# Altium PCB cs301_Team01_Artwork.PcbDoc (part 1 of 2)
Units mm, origin at the board's own origin, x right, y up, seen from the top; angles counter-clockwise.
Board outline 87.88 x 127 mm, 2 copper layers (Top Layer, Bottom Layer); 173 components, 113 nets, 459 pads, 113 vias.
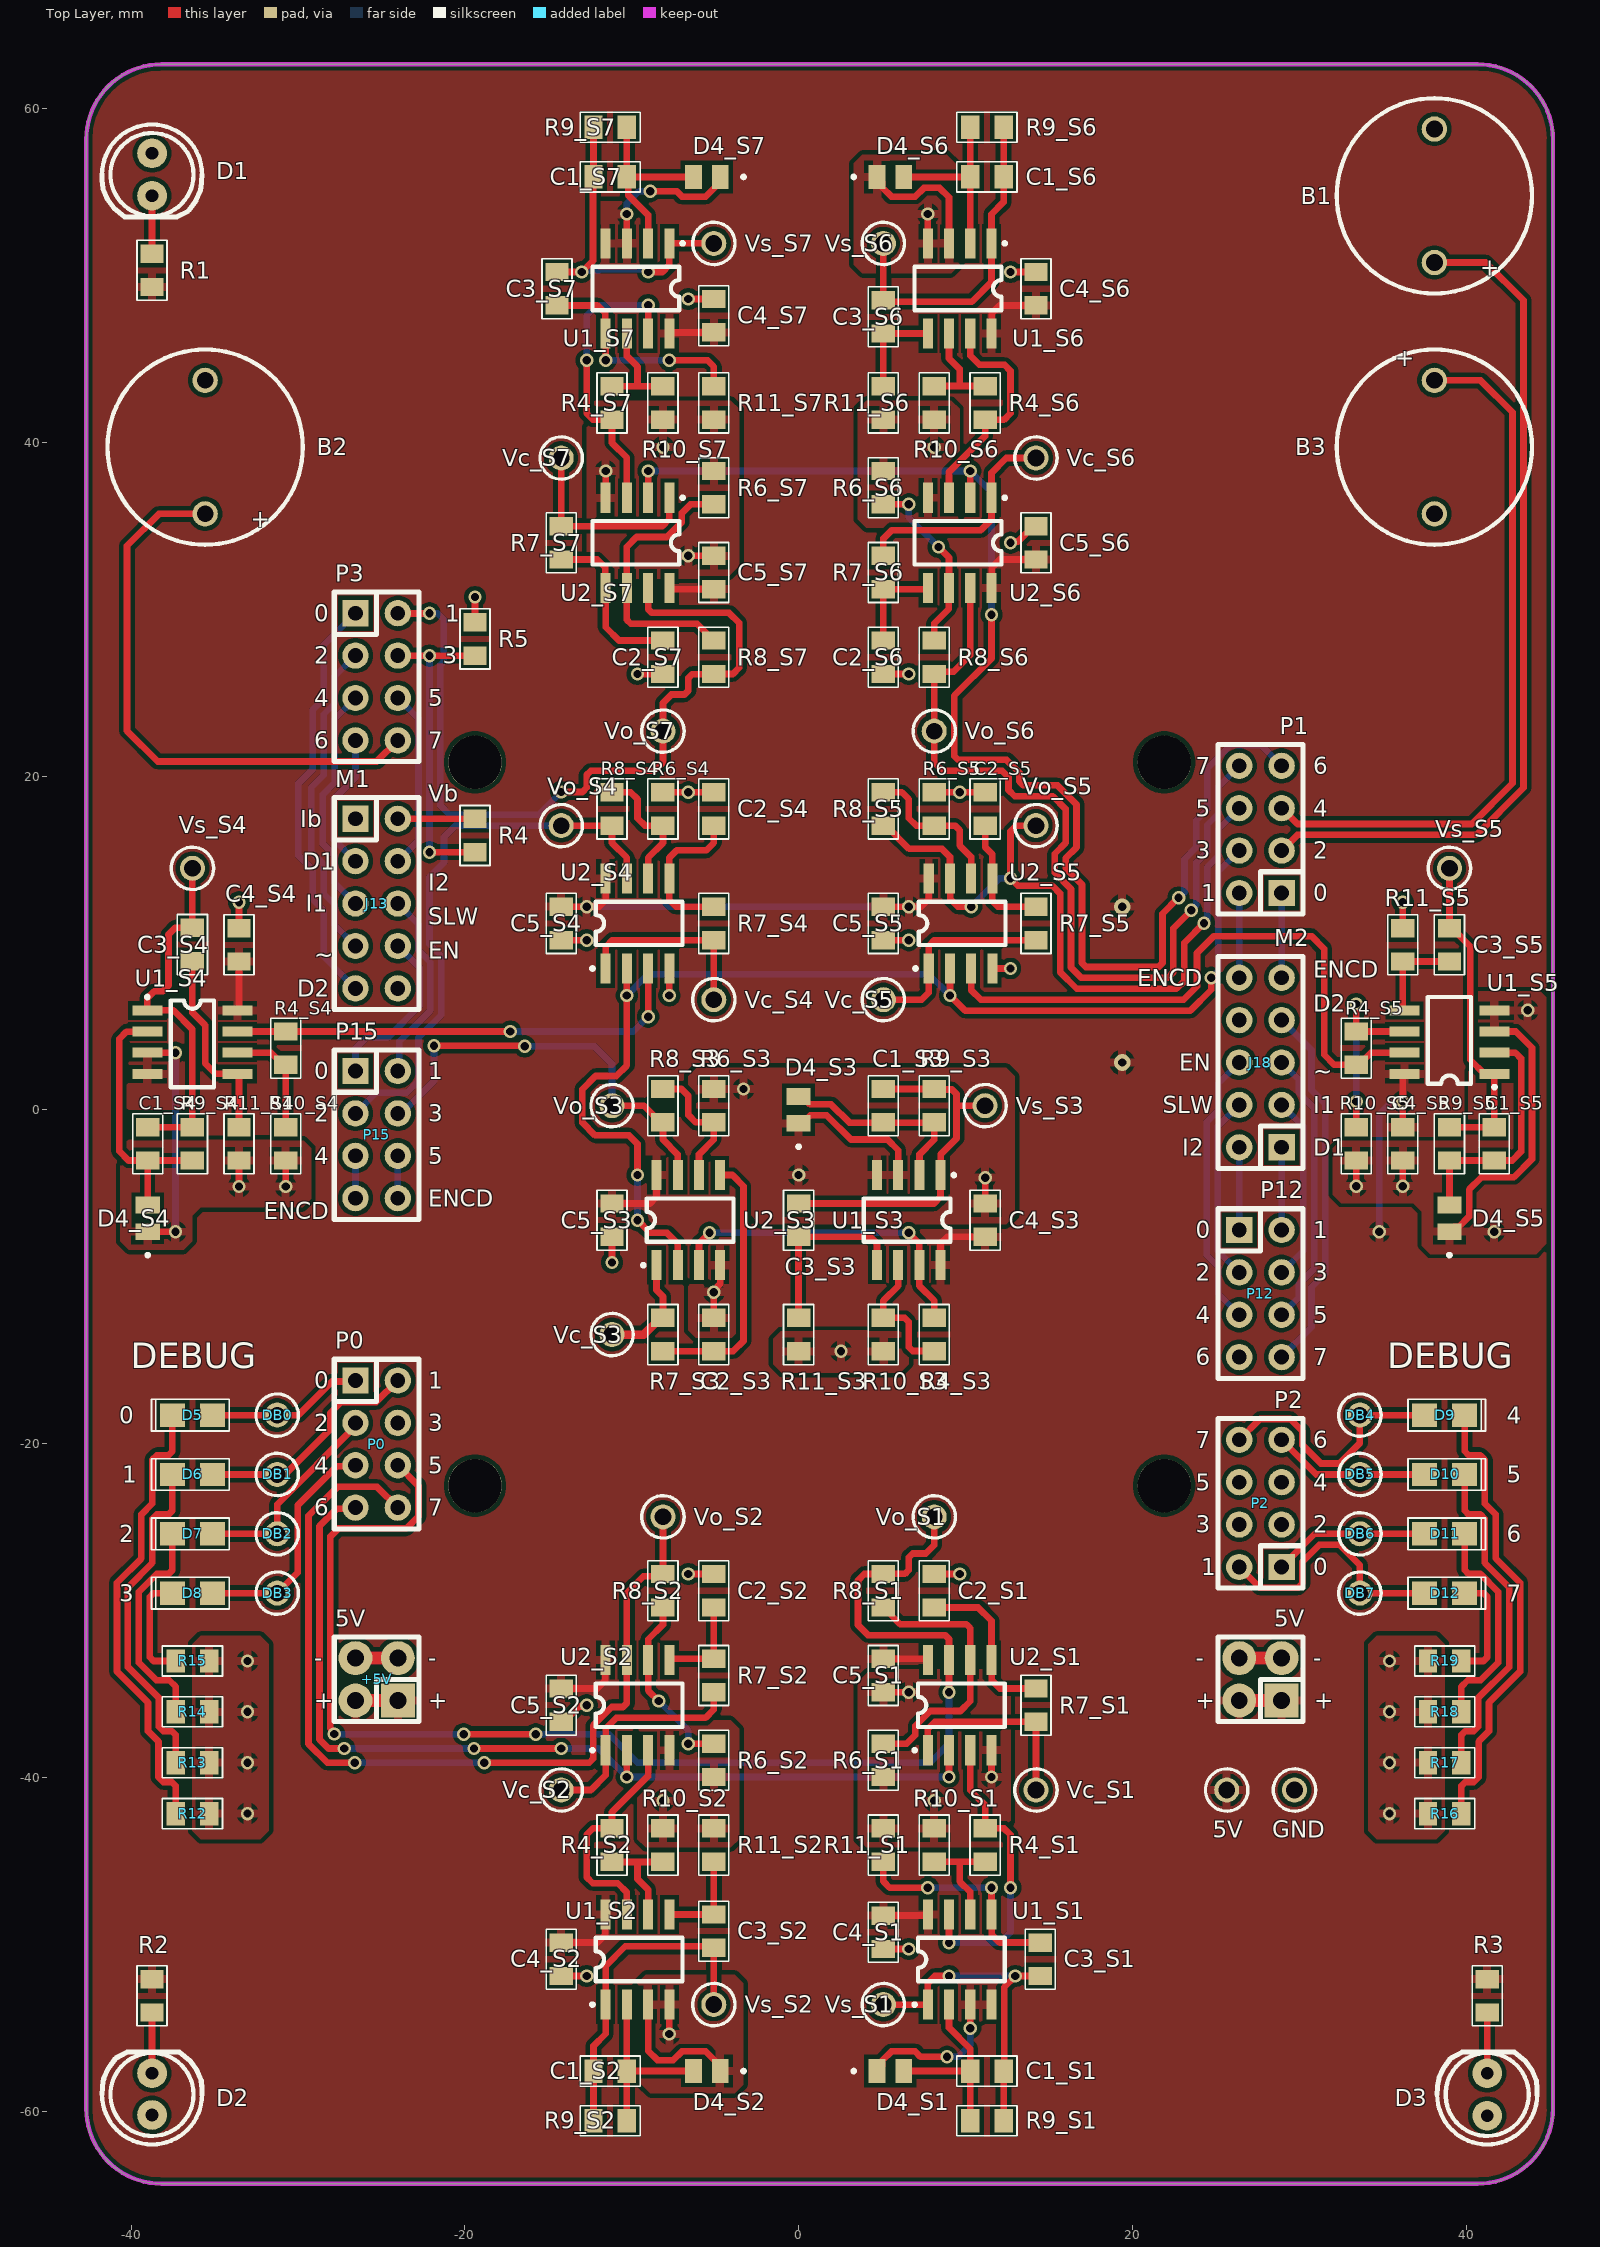
[diagram p0: Top Layer view]
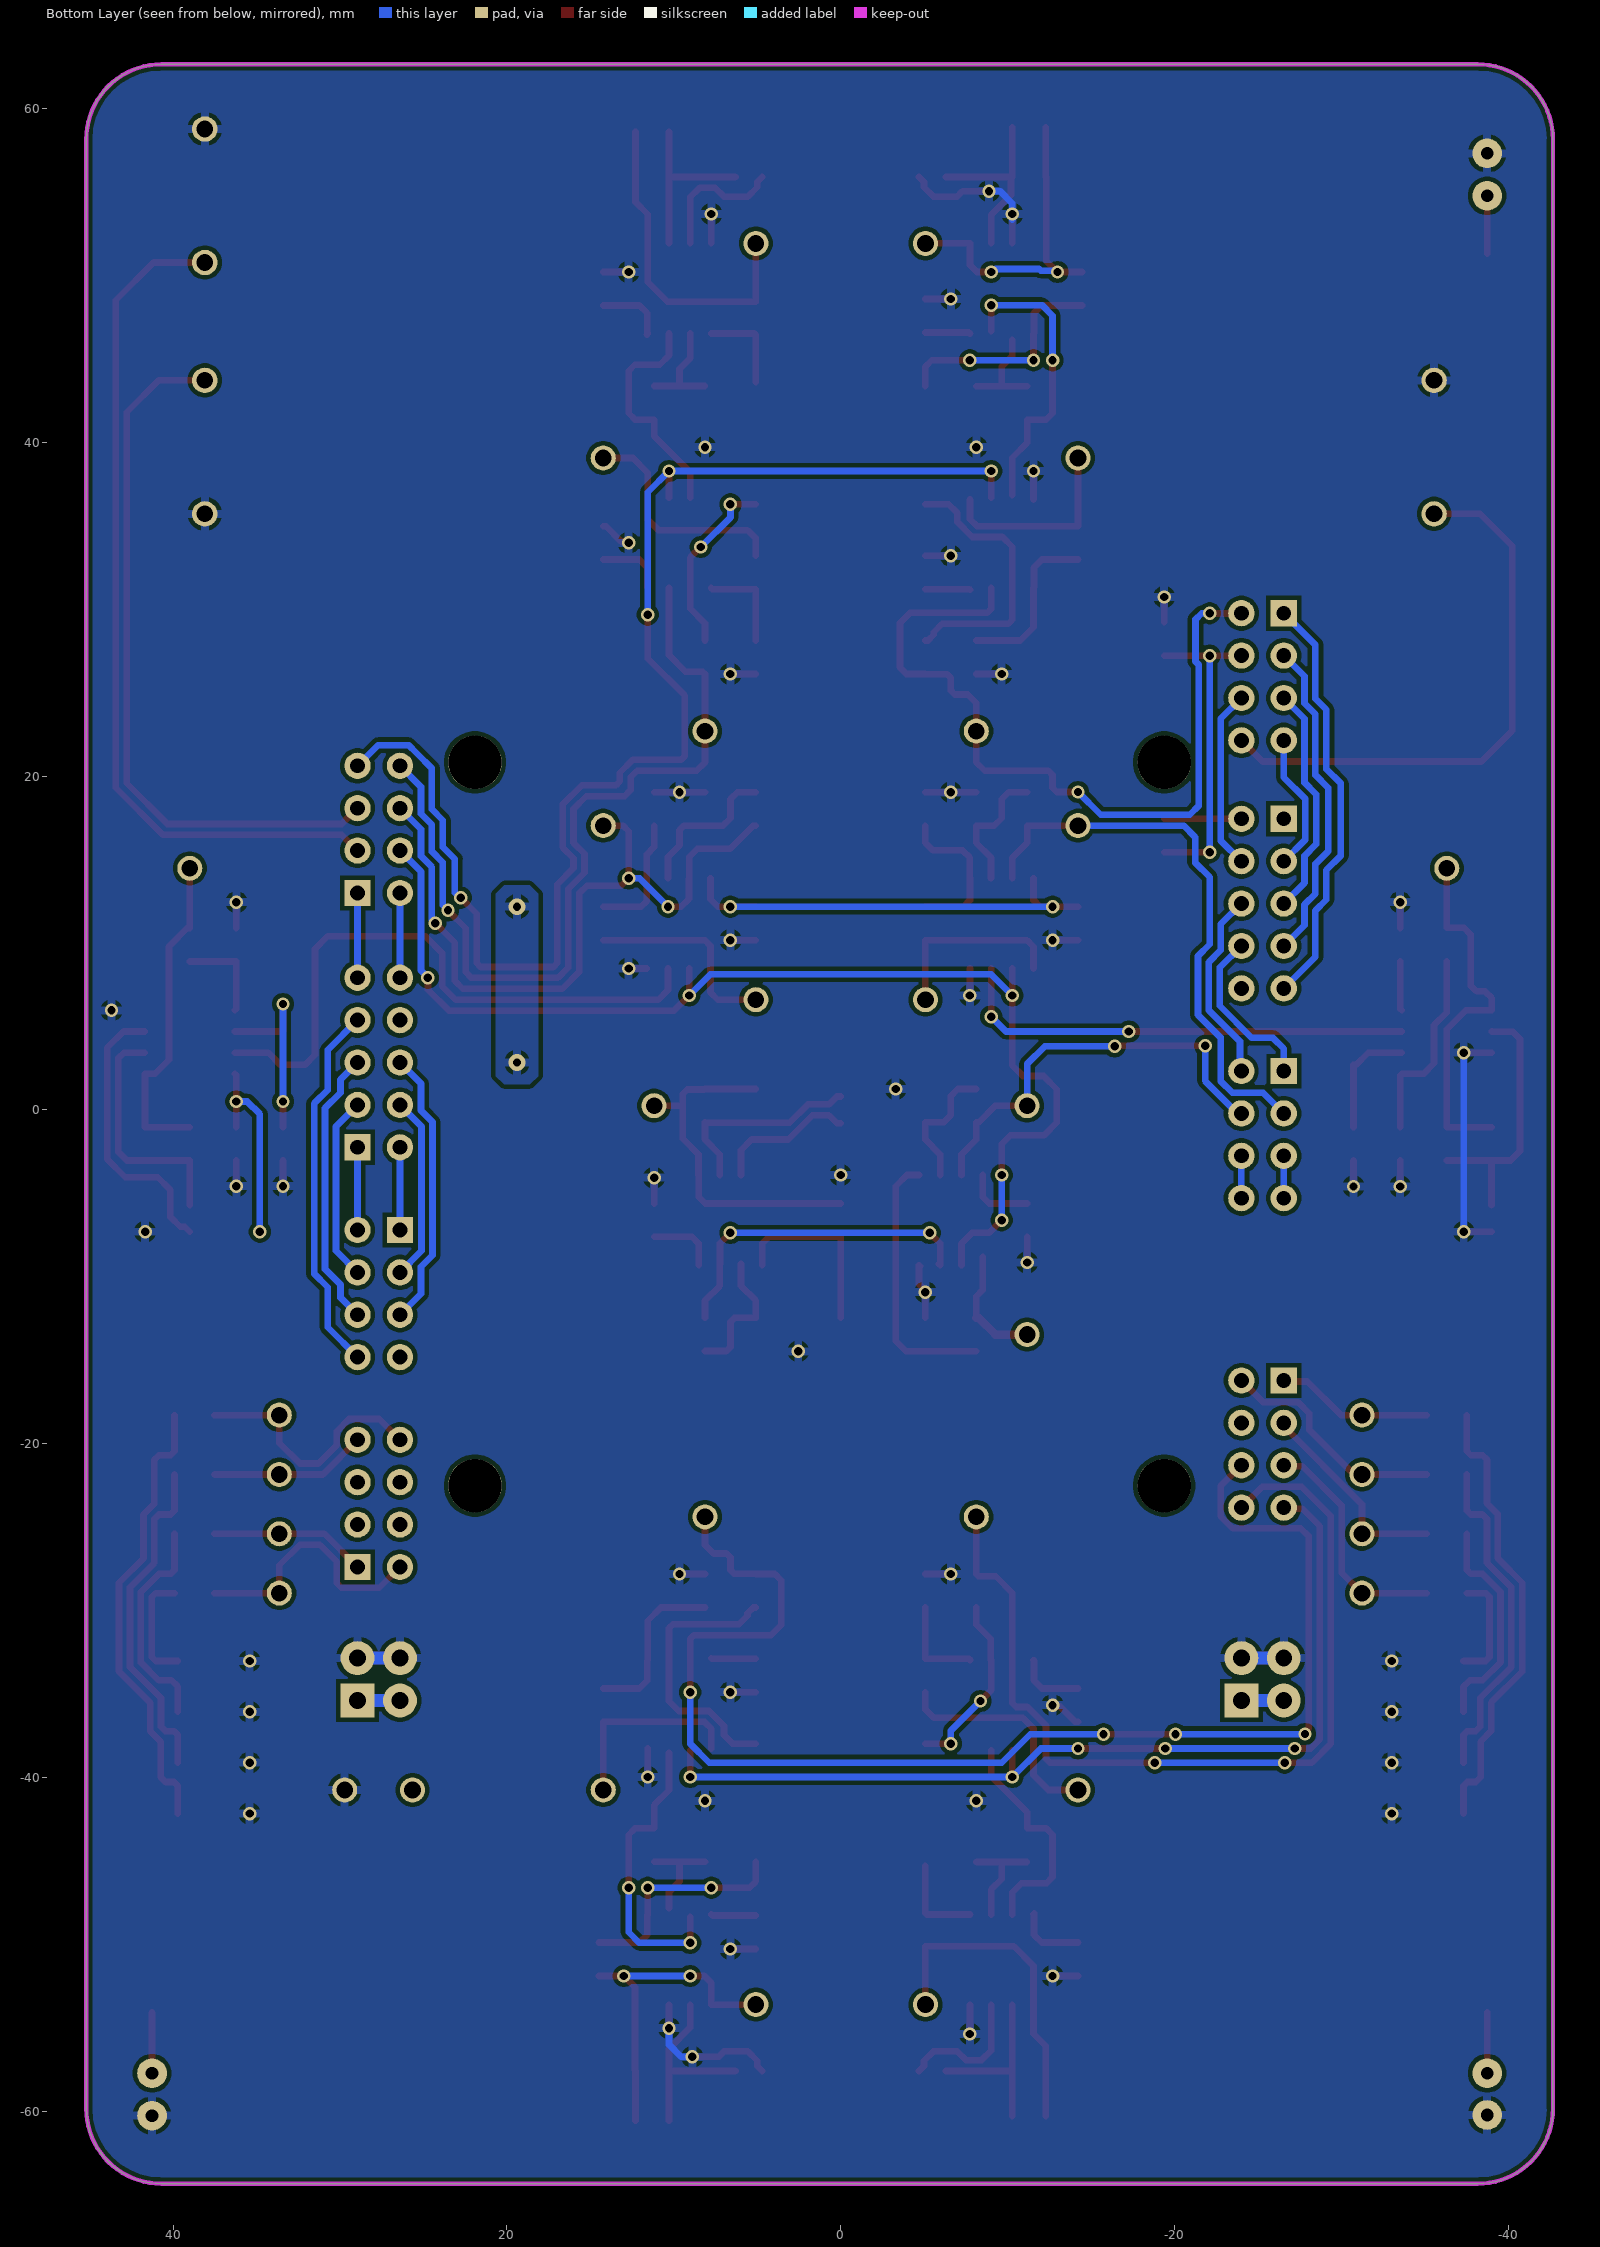
[diagram p1: Bottom Layer view, seen from below]

## Layer stack, top to bottom
Top Solder: solder mask 0.0102, Solder Resist, Dk 3.5
Top Layer: signal copper 0.0356
Dielectric1: dielectric 0.32, FR-4, Dk 4.8
Bottom Layer: signal copper 0.0356
Bottom Solder: solder mask 0.0102, Solder Resist, Dk 3.5

## Board outline
-42.682,-59.844 -42.682,58.156 cw(c-38.182,58.156) -38.182,62.656 40.702,62.656 cw(c40.702,58.156) 45.202,58.156 45.202,-59.844 cw(c40.702,-59.844) 40.702,-64.344 -38.182,-64.344 cw(c-38.182,-59.844)

## Design rules (kind name [scope] priority, off if disabled: settings)
Clearance [All] p1: gap=0.254 ignorepadtopadclearanceinfootprint=FALSE except(0: Arc-Hole Track-Hole SMDPad-Hole THPad-Hole Via-Hole Fill-Hole Poly-Hole Region-Hole Text-Hole)
HoleSize [All] p1: absolutevalues=TRUE maxlimit=3.2 minlimit=0.025 maxpercent=80.000 minpercent=20.000
MinimumSolderMaskSliver [All] p1: minsoldermaskwidth=0.1
PolygonConnect [All] p1: connectstyle=Relief reliefconductorwidth=0.508 reliefentries=4 polygonreliefangle="90 Angle" airgapwidth=0.254
RoomDefinition [InComponentClass('Room Definition1') vs False] p1: confinementstyle=ConfineIn formatcopy=TRUE lockcomponents=FALSE outline -41.402,-44.196 -29.426,-44.196 -29.426,-13.462 -41.402,-13.462
RoomDefinition RoomDefinition_1 [InComponentClass('Room Definition2') vs False] p2: confinementstyle=ConfineIn formatcopy=TRUE lockcomponents=FALSE outline 44.059,-44.307 31.829,-44.307 31.829,-13.462 44.059,-13.462
RoomDefinition S7 [InComponentClass('S7')] p3: confinementstyle=ConfineIn formatcopy=FALSE lockcomponents=FALSE outline -1.016,60.286 -18.288,60.286 -18.288,20.916 -1.016,20.916
RoomDefinition S6 [InComponentClass('S6')] p4: confinementstyle=ConfineIn formatcopy=TRUE lockcomponents=FALSE outline 18.288,60.286 1.016,60.286 1.016,20.916 18.288,20.916
RoomDefinition S1 [InComponentClass('S1')] p5: confinementstyle=ConfineIn formatcopy=FALSE lockcomponents=FALSE outline 1.016,-61.974 18.288,-61.974 18.288,-22.604 1.016,-22.604
RoomDefinition S3 [InComponentClass('S3')] p6: confinementstyle=ConfineIn formatcopy=FALSE lockcomponents=FALSE outline -12.916,-15.746 12.992,-15.746 12.992,2.542 -12.916,2.542
RoomDefinition S4 [InComponentClass('S4')] p7: confinementstyle=ConfineIn formatcopy=FALSE lockcomponents=FALSE outline -41.402,-9.396 -3.264,-9.396 -3.264,20.322 -41.402,20.322
RoomDefinition S5 [InComponentClass('S5')] p8: confinementstyle=ConfineIn formatcopy=FALSE lockcomponents=FALSE outline 3.34,-9.396 44.704,-9.396 44.704,20.322 3.34,20.322
RoomDefinition S2 [InComponentClass('S2')] p9: confinementstyle=ConfineIn formatcopy=FALSE lockcomponents=FALSE outline -18.288,-61.974 -1.016,-61.974 -1.016,-22.604 -18.288,-22.604
RoutingVias [All] p1: holewidth=0.5 width=0.8 viastyle="Through Hole" minholewidth=0.4 minwidth=0.6 maxholewidth=1 maxwidth=2
SilkToSolderMaskClearance SilkscreenOverComponentPads [IsPad] p1: minsilkscreentomaskgap=0.1 clearancetoexposedcopper=TRUE
SolderMaskExpansion [All] p1: expansion=0.102 istentingtop=FALSE
UnRoutedNet [All] p1: checkbadconnections=TRUE
Width [All] p1: maxlimit=0.762 minlimit=0.254 preferedwidth=0.4 minimp=50.000000 maximp=50.000000 favimp=50.000000
26 further rules are at their usual default settings.

## Classes and differential pairs
component class "Room Definition1": 0 D5 D6 D7 D8 DB1 DB2 DB3 R12 R13 R14 R15
net class V_Bias[1..7]: V_Bias0 V_Bias1 V_Bias3 V_Bias6
net class Is_White[1..7]: Is_White0 Is_White1 Is_White2 Is_White3 Is_White4 Is_White5 Is_White6 Is_White7
channel class cs301_Team01_Schematic_Sensor: S1 S2 S3 S4 S5 S6 S7
component class S7: C1_S7 C2_S7 C3_S7 C4_S7 C5_S7 D4_S7 R4_S7 R6_S7 R7_S7 R8_S7 R9_S7 R10_S7 R11_S7 U1_S7 U2_S7 Vc_S7 Vo_S7 Vs_S7
component class S6: C1_S6 C2_S6 C3_S6 C4_S6 C5_S6 D4_S6 R4_S6 R6_S6 R7_S6 R8_S6 R9_S6 R10_S6 R11_S6 U1_S6 U2_S6 Vc_S6 Vo_S6 Vs_S6
component class S5: C1_S5 C2_S5 C3_S5 C4_S5 C5_S5 D4_S5 R4_S5 R6_S5 R7_S5 R8_S5 R9_S5 R10_S5 R11_S5 U1_S5 U2_S5 Vc_S5 Vo_S5 Vs_S5
component class S4: C1_S4 C2_S4 C3_S4 C4_S4 C5_S4 D4_S4 R4_S4 R6_S4 R7_S4 R8_S4 R9_S4 R10_S4 R11_S4 U1_S4 U2_S4 Vc_S4 Vo_S4 Vs_S4
component class S3: C1_S3 C2_S3 C3_S3 C4_S3 C5_S3 D4_S3 R4_S3 R6_S3 R7_S3 R8_S3 R9_S3 R10_S3 R11_S3 U1_S3 U2_S3 Vc_S3 Vo_S3 Vs_S3
component class S2: C1_S2 C2_S2 C3_S2 C4_S2 C5_S2 D4_S2 R4_S2 R6_S2 R7_S2 R8_S2 R9_S2 R10_S2 R11_S2 U1_S2 U2_S2 Vc_S2 Vo_S2 Vs_S2
component class S1: C1_S1 C2_S1 C3_S1 C4_S1 C5_S1 D4_S1 R4_S1 R6_S1 R7_S1 R8_S1 R9_S1 R10_S1 R11_S1 U1_S1 U2_S1 Vc_S1 Vo_S1 Vs_S1

## Components (designator, comment, footprint, x,y, rotation, side; value= is the part's Value field where it differs from the comment)
5V "5003" TP_TH 25.654,-40.75 r0 top
5V "5V" IDC4 28.946,-35.388 r90 top locked
+5V "5V" IDC4 -24.013,-35.388 r90 top locked
B1 "clown" Buzzer 38.1,54.776 r90 top locked
B2 "clown" Buzzer -35.56,39.714 r90 top locked
B3 "clown" Buzzer 38.1,39.714 r270 top locked
C1_S1 "40p" "0805 CAP" 11.287,-57.594 r0 top locked (schematic designator C1)
C1_S2 "40p" "0805 CAP" -11.287,-57.594 r180 top locked (schematic designator C1)
C1_S3 "40p" "0805 CAP" 5.08,0.254 r90 top locked (schematic designator C1)
C1_S4 "40p" "0805 CAP" -39,-2.032 r90 top locked (schematic designator C1)
C1_S5 "40p" "0805 CAP" 41.678,-2.032 r90 top locked (schematic designator C1)
C1_S6 "40p" "0805 CAP" 11.287,55.906 r0 top locked (schematic designator C1)
C1_S7 "40p" "0805 CAP" -11.287,55.906 r180 top locked (schematic designator C1)
C2_S1 "1.6u" "0805 CAP" 8.128,-28.812 r270 top locked (schematic designator C2)
C2_S2 "1.6u" "0805 CAP" -5.08,-28.812 r270 top locked (schematic designator C2)
C2_S3 "1.6u" "0805 CAP" -5.08,-13.462 r270 top locked (schematic designator C2)
C2_S4 "1.6u" "0805 CAP" -5.08,18.034 r270 top locked (schematic designator C2)
C2_S5 "1.6u" "0805 CAP" 11.176,18.034 r270 top locked (schematic designator C2)
C2_S6 "1.6u" "0805 CAP" 5.08,27.124 r90 top locked (schematic designator C2)
C2_S7 "1.6u" "0805 CAP" -8.128,27.124 r90 top locked (schematic designator C2)
C3_S1 "47nF" "0805 CAP" 14.478,-50.894 r90 top locked (schematic designator C3)
C3_S2 "47nF" "0805 CAP" -5.08,-49.21 r90 top locked (schematic designator C3)
C3_S3 "47nF" "0805 CAP" 0,-6.604 r270 top locked (schematic designator C3)
C3_S4 "47nF" "0805 CAP" -36.322,9.906 r270 top locked (schematic designator C3)
C3_S5 "47nF" "0805 CAP" 39,9.89 r270 top locked (schematic designator C3)
C3_S6 "47nF" "0805 CAP" 5.08,47.522 r270 top locked (schematic designator C3)
C3_S7 "47nF" "0805 CAP" -14.478,49.206 r270 top locked (schematic designator C3)
C4_S1 "100n" "0805 CAP" 5.08,-49.276 r270 top locked (schematic designator C4)
C4_S2 "100n" "0805 CAP" -14.224,-50.894 r270 top locked (schematic designator C4)
C4_S3 "100n" "0805 CAP" 11.176,-6.604 r90 top locked (schematic designator C4)
C4_S4 "100n" "0805 CAP" -33.528,9.89 r90 top locked (schematic designator C4)
C4_S5 "100n" "0805 CAP" 36.206,-2.032 r270 top locked (schematic designator C4)
C4_S6 "100n" "0805 CAP" 14.224,49.206 r90 top locked (schematic designator C4)
C4_S7 "100n" "0805 CAP" -5.08,47.588 r90 top locked (schematic designator C4)
C5_S1 "100n" "0805 CAP" 5.08,-33.892 r270 top locked (schematic designator C5)
C5_S2 "100n" "0805 CAP" -14.224,-35.67 r270 top locked (schematic designator C5)
C5_S3 "100n" "0805 CAP" -11.176,-6.604 r270 top locked (schematic designator C5)
C5_S4 "100n" "0805 CAP" -14.224,11.176 r270 top locked (schematic designator C5)
C5_S5 "100n" "0805 CAP" 5.08,11.176 r270 top locked (schematic designator C5)
C5_S6 "100n" "0805 CAP" 14.224,33.982 r90 top locked (schematic designator C5)
C5_S7 "100n" "0805 CAP" -5.08,32.204 r90 top locked (schematic designator C5)
D1 "LED_S" LED0.1/5MM#1 -38.74,54.776 r180 top locked
D2 "LED_S" LED0.1/5MM#2 -38.74,-57.724 r0 top locked
D3 "LED_S" LED0.1/5MM#1 41.26,-57.724 r0 top locked
D4_S1 "SD019-101-411" XDCR_TEMD7000X01 5.5,-57.594 r0 top locked (schematic designator D4)
D4_S2 "SD019-101-411" XDCR_TEMD7000X01 -5.5,-57.594 r180 top locked (schematic designator D4)
D4_S3 "SD019-101-411" XDCR_TEMD7000X01 0,0 r90 top locked (schematic designator D4)
D4_S4 "SD019-101-411" XDCR_TEMD7000X01 -39,-6.5 r90 top locked (schematic designator D4)
D4_S5 "SD019-101-411" XDCR_TEMD7000X01 39,-6.5 r90 top locked (schematic designator D4)
D4_S6 "SD019-101-411" XDCR_TEMD7000X01 5.5,55.906 r0 top locked (schematic designator D4)
D4_S7 "SD019-101-411" XDCR_TEMD7000X01 -5.5,55.906 r180 top locked (schematic designator D4)
D5 "0" "0805 LED" -36.322,-18.288 r180 top locked
D6 "1" "0805 LED" -36.322,-21.844 r180 top locked
D7 "2" "0805 LED" -36.322,-25.4 r180 top locked
D8 "3" "0805 LED" -36.322,-28.956 r180 top locked
D9 "4" "0805 LED" 38.715,-18.288 r0 top locked
D10 "5" "0805 LED" 38.715,-21.844 r0 top locked
D11 "6" "0805 LED" 38.715,-25.4 r0 top locked
D12 "7" "0805 LED" 38.715,-28.956 r0 top locked
DB0 "5003" TP_TH -31.242,-18.288 r0 top locked
DB1 "5003" TP_TH -31.242,-21.844 r0 top locked
DB2 "5003" TP_TH -31.242,-25.4 r0 top locked
DB3 "5003" TP_TH -31.242,-28.956 r0 top locked
DB4 "5003" TP_TH 33.635,-18.288 r180 top locked
DB5 "5003" TP_TH 33.635,-21.844 r180 top locked
DB6 "5003" TP_TH 33.635,-25.4 r180 top locked
DB7 "5003" TP_TH 33.635,-28.956 r180 top locked
GND "5003" TP_TH 29.718,-40.75 r0 top
J13 "M1" IDC10 -26.553,17.444 r270 top locked
J18 "M2" IDC10 28.946,-2.241 r90 top locked
P0 "P0" idc8 -26.553,-16.211 r270 top locked
P1 "P1" idc8 28.946,12.999 r90 top locked
P2 "P2" idc8 28.946,-27.387 r90 top locked
P3 "P3" idc8 -26.553,29.763 r270 top locked
P12 "P12" idc8 26.406,-7.194 r270 top locked
P15 "P15" IDC8 -26.553,2.331 r270 top locked
R1 "330" "0805 RES" -38.74,50.308 r270 top locked
R2 "330" "0805 RES" -38.74,-53.086 r90 top locked
R3 "330" "0805 RES" 41.26,-53.086 r90 top locked
R4 "2.7k" "0805 RES" -19.39,16.444 r90 top locked
R4_S1 "100k" "0805 RES" 11.176,-44.052 r90 top locked (schematic designator R4)
R4_S2 "100k" "0805 RES" -11.176,-44.052 r90 top locked (schematic designator R4)
R4_S3 "100k" "0805 RES" 8.128,-13.462 r90 top locked (schematic designator R4)
R4_S4 "100k" "0805 RES" -30.734,3.699 r90 top locked (schematic designator R4)
R4_S5 "100k" "0805 RES" 33.412,3.699 r270 top locked (schematic designator R4)
R4_S6 "100k" "0805 RES" 11.176,42.364 r270 top locked (schematic designator R4)
R4_S7 "100k" "0805 RES" -11.176,42.364 r270 top locked (schematic designator R4)
R5 "10k" "0805 RES" -19.39,28.223 r270 top locked
R6_S1 "33k" "0805 RES" 5.08,-38.972 r270 top locked (schematic designator R6)
R6_S2 "33k" "0805 RES" -5.08,-38.972 r270 top locked (schematic designator R6)
R6_S3 "33k" "0805 RES" -5.08,0.254 r90 top locked (schematic designator R6)
R6_S4 "33k" "0805 RES" -8.128,18.034 r90 top locked (schematic designator R6)
R6_S5 "33k" "0805 RES" 8.128,18.034 r90 top locked (schematic designator R6)
R6_S6 "33k" "0805 RES" 5.08,37.284 r90 top locked (schematic designator R6)
R6_S7 "33k" "0805 RES" -5.08,37.284 r90 top locked (schematic designator R6)
R7_S1 "10k" "0805 RES" 14.224,-35.67 r270 top locked (schematic designator R7)
R7_S2 "10k" "0805 RES" -5.08,-33.892 r270 top locked (schematic designator R7)
R7_S3 "10k" "0805 RES" -8.128,-13.462 r90 top locked (schematic designator R7)
R7_S4 "10k" "0805 RES" -5.08,11.176 r270 top locked (schematic designator R7)
R7_S5 "10k" "0805 RES" 14.224,11.176 r270 top locked (schematic designator R7)
R7_S6 "10k" "0805 RES" 5.08,32.204 r90 top locked (schematic designator R7)
R7_S7 "10k" "0805 RES" -14.224,33.982 r90 top locked (schematic designator R7)
R8_S1 "100k" "0805 RES" 5.08,-28.812 r270 top locked (schematic designator R8)
R8_S2 "100k" "0805 RES" -8.128,-28.812 r270 top locked (schematic designator R8)
R8_S3 "100k" "0805 RES" -8.128,0.254 r90 top locked (schematic designator R8)
R8_S4 "100k" "0805 RES" -11.176,18.034 r90 top locked (schematic designator R8)
R8_S5 "100k" "0805 RES" 5.08,18.034 r90 top locked (schematic designator R8)
R8_S6 "100k" "0805 RES" 8.128,27.124 r90 top locked (schematic designator R8)
R8_S7 "100k" "0805 RES" -5.08,27.124 r90 top locked (schematic designator R8)
R9_S1 "4M" "0805 RES" 11.287,-60.562 r0 top locked (schematic designator R9)
R9_S2 "4M" "0805 RES" -11.287,-60.562 r180 top locked (schematic designator R9)
R9_S3 "4M" "0805 RES" 8.128,0.254 r90 top locked (schematic designator R9)
R9_S4 "4M" "0805 RES" -36.322,-2.032 r90 top locked (schematic designator R9)
R9_S5 "4M" "0805 RES" 39,-2.032 r90 top locked (schematic designator R9)
R9_S6 "4M" "0805 RES" 11.287,58.874 r0 top locked (schematic designator R9)
R9_S7 "4M" "0805 RES" -11.287,58.874 r180 top locked (schematic designator R9)
R10_S1 "42k" "0805 RES" 8.128,-44.052 r270 top locked (schematic designator R10)
R10_S2 "42k" "0805 RES" -8.128,-44.052 r270 top locked (schematic designator R10)
R10_S3 "42k" "0805 RES" 5.08,-13.462 r90 top locked (schematic designator R10)
R10_S4 "42k" "0805 RES" -30.734,-2.032 r90 top locked (schematic designator R10)
R10_S5 "42k" "0805 RES" 33.412,-2.032 r90 top locked (schematic designator R10)
R10_S6 "42k" "0805 RES" 8.128,42.364 r90 top locked (schematic designator R10)
R10_S7 "42k" "0805 RES" -8.128,42.364 r90 top locked (schematic designator R10)
R11_S1 "42k" "0805 RES" 5.08,-44.052 r270 top locked (schematic designator R11)
R11_S2 "42k" "0805 RES" -5.08,-44.052 r270 top locked (schematic designator R11)
R11_S3 "42k" "0805 RES" 0,-13.462 r90 top locked (schematic designator R11)
R11_S4 "42k" "0805 RES" -33.528,-2.032 r90 top locked (schematic designator R11)
R11_S5 "42k" "0805 RES" 36.206,9.89 r270 top locked (schematic designator R11)
R11_S6 "42k" "0805 RES" 5.08,42.364 r90 top locked (schematic designator R11)
R11_S7 "42k" "0805 RES" -5.08,42.364 r90 top locked (schematic designator R11)
R12 "330" "0805 RES" -36.322,-42.164 r180 top locked
R13 "330" "0805 RES" -36.322,-39.116 r180 top locked
R14 "330" "0805 RES" -36.322,-36.068 r180 top locked
R15 "330" "0805 RES" -36.322,-33.02 r180 top locked
R16 "330" "0805 RES" 38.715,-42.164 r0 top locked
R17 "330" "0805 RES" 38.715,-39.116 r0 top locked
R18 "330" "0805 RES" 38.715,-36.068 r0 top locked
R19 "330" "0805 RES" 38.715,-33.02 r0 top locked
U1_S1 "TLC082" "SO - 8" 9.652,-50.91 r90 top locked (schematic designator U1)
U1_S2 "TLC082" "SO - 8" -9.652,-50.91 r90 top locked (schematic designator U1)
U1_S3 "TLC082" "SO - 8" 6.604,-6.604 r270 top locked (schematic designator U1)
U1_S4 "TLC082" "SO - 8" -36.322,4.064 r0 top locked (schematic designator U1)
U1_S5 "TLC082" "SO - 8" 39,4.064 r180 top locked (schematic designator U1)
U1_S6 "TLC082" "SO - 8" 9.652,49.222 r270 top locked (schematic designator U1)
U1_S7 "TLC082" "SO - 8" -9.652,49.222 r270 top locked (schematic designator U1)
U2_S1 "TLC082" "SO - 8" 9.652,-35.67 r90 top locked (schematic designator U2)
U2_S2 "TLC082" "SO - 8" -9.652,-35.67 r90 top locked (schematic designator U2)
U2_S3 "TLC082" "SO - 8" -6.604,-6.604 r90 top locked (schematic designator U2)
U2_S4 "TLC082" "SO - 8" -9.652,11.176 r90 top locked (schematic designator U2)
U2_S5 "TLC082" "SO - 8" 9.705,11.176 r90 top locked (schematic designator U2)
U2_S6 "TLC082" "SO - 8" 9.652,33.982 r270 top locked (schematic designator U2)
U2_S7 "TLC082" "SO - 8" -9.652,33.982 r270 top locked (schematic designator U2)
Vc_S1 "5003" TP_TH 14.224,-40.75 r0 top locked (schematic designator Vc)
Vc_S2 "5003" TP_TH -14.224,-40.75 r0 top locked (schematic designator Vc)
Vc_S3 "5003" TP_TH -11.176,-13.462 r0 top locked (schematic designator Vc)
Vc_S4 "5003" TP_TH -5.08,6.604 r0 top locked (schematic designator Vc)
Vc_S5 "5003" TP_TH 5.08,6.604 r0 top locked (schematic designator Vc)
Vc_S6 "5003" TP_TH 14.224,39.062 r180 top locked (schematic designator Vc)
Vc_S7 "5003" TP_TH -14.224,39.062 r180 top locked (schematic designator Vc)
Vo_S1 "5003" TP_TH 8.128,-24.384 r0 top locked (schematic designator Vo)
Vo_S2 "5003" TP_TH -8.128,-24.384 r0 top locked (schematic designator Vo)
Vo_S3 "5003" TP_TH -11.176,0.254 r0 top locked (schematic designator Vo)
Vo_S4 "5003" TP_TH -14.224,17.034 r0 top locked (schematic designator Vo)
Vo_S5 "5003" TP_TH 14.224,17.034 r0 top locked (schematic designator Vo)
Vo_S6 "5003" TP_TH 8.128,22.696 r180 top locked (schematic designator Vo)
Vo_S7 "5003" TP_TH -8.128,22.696 r180 top locked (schematic designator Vo)
Vs_S1 "5003" TP_TH 5.08,-53.61 r0 top locked (schematic designator Vs)
Vs_S2 "5003" TP_TH -5.08,-53.61 r0 top locked (schematic designator Vs)
Vs_S3 "5003" TP_TH 11.176,0.254 r0 top locked (schematic designator Vs)
Vs_S4 "5003" TP_TH -36.322,14.478 r0 top locked (schematic designator Vs)
Vs_S5 "5003" TP_TH 39,14.478 r0 top locked (schematic designator Vs)
Vs_S6 "5003" TP_TH 5.08,51.922 r180 top locked (schematic designator Vs)
Vs_S7 "5003" TP_TH -5.08,51.922 r180 top locked (schematic designator Vs)

## Footprints (in the part's own frame and the unit in brackets; to place one, negate y for a bottom-side part, rotate by r counter-clockwise, add the part's x,y. Pads: shape width x height; smd on the part's side, far side on the other; paste and mask are expansions set on the pad)
"0805 CAP" [mm] "http://www.digikey.co.nz/Web%20Export/Supplier%20Content/Vishay_8026/PDF/VishayBeyschlag_SolderPad.pdf?redirected=1 with dimension G modified by +0.25mm"
  rect 1.1x1.4 smd: 1(-1,0) 2(1,0)
  silkscreen extent -1.8,-0.9 1.8,0.9, body extent -1.04,-0.66 1.04,0.66, height 0.61
"0805 LED" [mm] "RED AS AlGaAs SMD LED, Body; 2mm x 1.25 mm (LxW)"
  rect 1.5x1.4 smd: 1(-1.2,0) 2(1.2,0)
  silkscreen extent -2.2,-0.95 2.45,0.95, body extent -1,-0.63 1,0.63, height 1.1
"0805 RES" [mm] "http://www.digikey.co.nz/Web%20Export/Supplier%20Content/Vishay_8026/PDF/VishayBeyschlag_SolderPad.pdf?redirected=1 with dimension G modified by +0.25mm"
  rect 1.1x1.4 smd: 1(-1,0) 2(1,0)
  silkscreen extent -1.8,-0.9 1.8,0.9, body extent -1.04,-0.66 1.04,0.66, height 0.61
Buzzer [mm]
  round 1.524 hole 1: 1(-4,0) 2(4,0)
  silkscreen extent -5.85,-5.85 5.85,5.85, body extent -5.85,-5.85 5.85,5.85, height 8
IDC4 [mil]
  rect 80x80 hole 40: 1(0,0)
  round 80 hole 40: 2(0,100) 3(100,0) 4(100,100)
  silkscreen extent -50,-50 150,150
idc8 [mil]
  rect 62x62 hole 35: 1(0,0)
  round 62 hole 35: 2(0,100) 3(100,0) 4(100,100) 5(200,0) 6(200,100) 7(300,0) 8(300,100)
  silkscreen extent -50,-50 350,150
IDC8 [mil]
  rect 62x62 hole 35: 1(0,0)
  round 62 hole 35: 2(0,100) 3(100,0) 4(100,100) 5(200,0) 6(200,100) 7(300,0) 8(300,100)
  silkscreen extent -50,-50 350,150
IDC10 [mil]
  rect 62x62 hole 35: 1(0,0)
  round 62 hole 35: 2(0,100) 3(100,0) 4(100,100) 5(200,0) 6(200,100) 7(300,0) 8(300,100) 9(400,0) 10(400,100)
  silkscreen extent -50,-50 450,150
LED0.1/5MM#1 [mil]
  round 70 hole 30: A(0,0) K(0,-100)
  silkscreen extent -118,-168 118,50
LED0.1/5MM#2 [mil]
  round 70 hole 30: A(0,0) K(0,-98.43)
  silkscreen extent -118,-168 118,50
"SO - 8" [mm]
  rect 1.8x0.6 smd: 1(-2.7,1.905) 2(-2.7,0.635) 3(-2.7,-0.635) 4(-2.7,-1.905) 5(2.7,-1.905) 6(2.7,-0.635) 7(2.7,0.635) 8(2.7,1.905)
  silkscreen extent -2.8,-2.7 1.3,2.8, body extent -3.1,-2.5 3.1,2.5, height 1.8
TP_TH [mm] "Test Point, Through Hole, Dia 2.54mm"
  round 1.5 hole 1: 1(0,0)
  silkscreen extent -1.27,-1.27 1.27,1.27, body extent -1.27,-1.27 1.27,1.27, height 4.57
XDCR_TEMD7000X01 [mm]
  rect 1x1.45 smd: A(-0.8,0) C(0.8,0)
  silkscreen extent -2.3,-0.1 -2.1,0.1, body extent -1,-0.63 1,0.63, height 0.85

## Part data
5V DB0 DB1 DB2 DB3 DB4 DB5 DB6 DB7 GND Vc_S1 Vc_S2 Vc_S3 Vc_S4 Vc_S5 Vc_S6 Vc_S7 Vo_S1 Vo_S2 Vo_S3 Vo_S4 Vo_S5 Vo_S6 Vo_S7 Vs_S1 Vs_S2 Vs_S3 Vs_S4 Vs_S5 Vs_S6 Vs_S7: library part TestPoint, "Test Point, Orange, 1-Pin THD, RoHS", Forward Current="3 A", Forward Voltage="1.08 V", Max Operating Temperature="150 degC", Max Surge Current="80 A", Min Operating Temperature="-65 degC", Package Quantity=500, Peak Reverse Current="600 uA", ComponentLink1Description="Manufacturer URL", ComponentLink1URL=http://www.keyelco.com/, ComponentLink2Description=Datasheet, ComponentLink2URL=http://keyelco.com/userAssets/file/M65p56.pdf, DatasheetVersion=Jun-15, Diameter="5.3 mm", Height="0.25 inch", Length="9.5 mm", Mount="Through Hole", PackageDescription="1-Pin Through Hole Device, Dia 2.54 mm", PackageReference=5003, Packaging=Bulk, Pins=2, Radiation Hardening=No, REACH SVHC="No SVHC", RoHSCompliant=true, Weight="0.01 lb", Width="0.25 inch"
5V +5V: library part CON4, "Connector"
B1 B2 B3: library part Buzzer
C1_S1 C1_S2 C1_S3 C1_S4 C1_S5 C1_S6 C1_S7 C2_S1 C2_S2 C2_S3 C2_S4 C2_S5 C2_S6 C2_S7 C3_S1 C3_S2 C3_S3 C3_S4 C3_S5 C3_S6 C3_S7 C4_S1 C4_S2 C4_S3 C4_S4 C4_S5 C4_S6 C4_S7 C5_S1 C5_S2 C5_S3 C5_S4 C5_S5 C5_S6 C5_S7: library part CerCap_SMT_0805, "SMT ceramic capacitor 0805 size"
D1 D2 D3: library part LED
D4_S1 D4_S2 D4_S3 D4_S4 D4_S5 D4_S6 D4_S7: library part TEMD7000X01, "Photodiode SD019-101-411", Package="0805 Vishay", Availability="In Stock", Check_prices=https://www.snapeda.com/parts/TEMD7000X01/Vishay+Semiconductor+Opto+Division/view-part/?ref=eda, MF="Vishay Semiconductor", MP=TEMD7000X01, Price=None, Purchase-URL=https://pricing.snapeda.com/search/part/TEMD7000X01/?ref=eda, SnapEDA_Link=https://www.snapeda.com/parts/TEMD7000X01/Vishay+Semiconductor+Opto+Division/view-part/?ref=snap
D5 D6 D7 D8 D9 D10 D11 D12: library part LED_SMT_0805, "SMT LED 0805 size", Color=Green, Current - Test=20mA, Lens Color=Colorless, Manufacturer="Lite-On Inc.", Manufacturer Part Number=LTST-C170KGKT, Millicandela Rating=35mcd, Package / Case="0805 (2012 Metric)", Supplier Part Number 1=160-1414-1-ND, Voltage - Forward (Vf) (Typ)=2V, Category=Optoelectronics, ComponentLink1Description=http://optoelectronics.liteon.com/upload/download/DS22-2000-073/LTST-C170KGKT.pdf, ComponentLink1URL=http://optoelectronics.liteon.com/upload/download/DS22-2000-073/LTST-C170KGKT.pdf, Features=-, Height (Max)=1.10mm, Lens Style/Size="Rectangle with Flat Top, 1.40mm x 1.25mm", Lens Transparency=Clear, Mounting Type="Surface Mount", Packaging="Cut Tape (CT)", Part Status=Active, Pricing 1="1=0.62, 10=0.459, 25=0.338, 100=0.2415, 250=0.16416, 500=0.14486, 1000=0.11347 (NZD)", RoHS="RoHS Compliant", Size / Dimension="2.00mm L x 1.25mm W", Stock 1=503069, Supplier 1=Digi-Key, Viewing Angle=130°, Wavelength - Dominant=571nm, Wavelength - Peak=574nm
J13 J18: library part CON10, "Connector"
P0 P1 P2 P3: library part CON8, "Connector"
P12 P15: library part CON8_1, "Connector"
R1 R2 R3 R4 R4_S1 R4_S2 R4_S3 R4_S4 R4_S5 R4_S6 R4_S7 R5 R6_S1 R6_S2 R6_S3 R6_S4 R6_S5 R6_S6 R6_S7 R7_S1 R7_S2 R7_S3 R7_S4 R7_S5 R7_S6 R7_S7 R8_S1 R8_S2 R8_S3 R8_S4 R8_S5 R8_S6 R8_S7 R9_S1 R9_S2 R9_S3 R9_S4 R9_S5 R9_S6 R9_S7 R10_S1 R10_S2 R10_S3 R10_S4 R10_S5 R10_S6 R10_S7 R11_S1 R11_S2 R11_S3 R11_S4 R11_S5 R11_S6 R11_S7 R12 R13 R14 R15 R16 R17 R18 R19: library part Res_SMT_0805, "0805 resistor", ComponentLink1Description=https://nz.mouser.com/datasheet/2/315/AOA0000C304-1149620.pdf, LatestRevisionDate=17-Jul-2002, LatestRevisionNote="Re-released for DXP Platform.", PackageReference=AXIAL-0.4, Published=8-Jun-2000, Publisher="Altium Limited"
U1_S1 U1_S2 U1_S3 U1_S4 U1_S5 U1_S6 U1_S7 U2_S1 U2_S2 U2_S3 U2_S4 U2_S5 U2_S6 U2_S7: library part TLC082_SMT_SOIC8, "IC OPAMP GP 10MHZ 8SOIC", Current - Supply=1.9mA, Manufacturer="Texas Instruments", Manufacturer Part Number=TLC082CDR, Operating Temperature="0°C ~ 70°C", Package / Case="8-SOIC (0.154\", 3.90mm Width)", Supplier Device Package=8-SOIC, Supplier Part Number 1=296-2421-1-ND, Voltage - Supply, Single/Dual (±)="4.5 V ~ 16 V, ±2.25 V ~ 8 V", Amplifier Type="General Purpose", Base Part Number=TLC082, Category="Integrated Circuits (ICs)", ComponentLink1Description=http://www.ti.com/lit/ds/symlink/tlc080a.pdf, ComponentLink1URL=http://www.ti.com/lit/ds/symlink/tlc080a.pdf, Mounting Type="Surface Mount", Output Type=-, Packaging="Cut Tape (CT)", Part Status=Active, Pricing 1="1=3.44, 10=3.087, 100=2.4808, 500=2.03822, 1000=1.68881 (NZD)", RoHS="RoHS Compliant", Slew Rate="19 V/µs", Stock 1=29765, Supplier 1=Digi-Key

## Free pads (board coordinates)
  round 3.2 hole 3.2 unplated: 1(-19.39,-22.51) 1(-19.39,20.822) 1(21.91,-22.51) 1(21.91,20.822)

## Via types
v1: diameter 0.8, hole 0.5, Top Layer to Bottom Layer, 111 vias
v2: diameter 1, hole 0.5, Top Layer to Bottom Layer, 2 vias

## Nets (pads, with @x,y where several pads share a name; then routed paths per layer and width w, separated by ;. In a path a pad name is that pad's centre, name@x,y a point inside that pad or via, vN(x,y) a via of type N, cw(c..) or ccw(c..) an arc to the next point about the centre after c; other vN are vias at no path point)
5V: 5V.1 5V.2 +5V.1 +5V.2 C4_S1.1 C4_S2.1 C4_S3.1 C4_S4.1 C4_S5.1 C4_S6.1 C4_S7.1 C5_S1.1 C5_S2.1 C5_S3.1 C5_S4.1 C5_S5.1 C5_S6.1 C5_S7.1 R1.2 R2.2 R3.2 U1_S1.8 U1_S2.8 U1_S3.8 U1_S4.8 U1_S5.8 U1_S6.8 U1_S7.8 U2_S1.8 U2_S2.8 U2_S3.8 U2_S4.8 U2_S5.8 U2_S6.8 U2_S7.8 | length 89.7
  Top Layer w0.4: U1_S4.8@-33.622,5.969 -33.528,6.063 C4_S4.1@-33.528,8.89 ; C4_S2.1@-14.224,-49.894 -12.048,-49.894 -11.585,-49.431 -11.585,-48.238 U1_S2.8@-11.557,-48.21 -11.557,-48.194 U1_S2.8@-11.603,-48.148 ; C5_S2.1@-14.224,-34.67 -12.064,-34.67 -11.585,-34.191 -11.585,-32.998 U2_S2.8@-11.557,-32.97 ; C5_S4.1@-14.224,12.176 v1(-12.7,12.176) -11.954,12.176 -11.557,12.573 U2_S4.8@-11.557,13.876 ; C5_S3.1@-11.176,-5.604 -8.906,-5.604 -8.509,-5.207 U2_S3.8@-8.509,-3.904 ; U2_S7.8@-7.747,31.172 -7.715,31.204 C5_S7.1@-5.08,31.204 ; U1_S7.8@-7.747,46.522 -7.681,46.588 C4_S7.1@-5.08,46.588 ; C4_S1.1@5.08,-48.276 7.681,-48.276 U1_S1.8@7.747,-48.21 ; C5_S1.1@5.08,-32.892 7.715,-32.892 U2_S1.8@7.747,-32.86 ; C5_S5.1@5.08,12.176 v1(6.604,12.176) 7.35,12.176 7.8,12.626 U2_S5.8@7.8,13.876 ; U1_S3.8@8.509,-9.304 8.509,-8.001 8.906,-7.604 C4_S3.1@11.176,-7.604 ; U2_S6.8@11.557,31.282 11.585,31.31 11.585,32.503 12.064,32.982 C5_S6.1@14.224,32.982 ; U1_S6.8@11.603,46.46 11.557,46.506 U1_S6.8@11.557,46.522 11.585,46.55 11.585,47.743 12.048,48.206 C4_S6.1@14.224,48.206 ; v1(36.206,0.508) C4_S5.1@36.206,-1.032 36.206,2.065 U1_S5.8@36.3,2.159
  Top Layer w0.762: +5V.2@-26.553,-35.388 +5V.1@-24.013,-35.388 ; 5V.2@26.406,-35.388 5V.1@28.946,-35.388
  Bottom Layer w0.4: v1(-12.7,12.176) 6.588,12.176 v1@6.604,12.192 ; v1(34.798,-7.3) 34.798,-0.254 35.56,0.508 v1(36.206,0.508)
  Bottom Layer w0.762: +5V.2@-26.553,-35.388 +5V.1@-24.013,-35.388 ; 5V.2@26.406,-35.388 5V.1@28.946,-35.388
  other v2: 19.393,2.839 19.393,12.176
DB0: D5.1 DB0.1 P0.1 | length 9.4
  Top Layer w0.4: D5.1@-35.122,-18.288 -29.972,-18.288 -27.96,-16.276 -26.618,-16.276 P0.1@-26.553,-16.211
DB1: D6.1 DB1.1 P0.2 | length 14
  Top Layer w0.4: D6.1@-35.122,-21.844 DB1.1@-31.242,-21.844 -31.032,-21.634 -30.559,-21.634 -28.072,-19.146 -28.072,-18.173 -27.409,-17.51 -25.312,-17.51 P0.2@-24.013,-16.211
DB2: D7.1 DB2.1 P0.3 | length 12.5
  Top Layer w0.4: D7.1@-35.122,-25.4 DB2.1@-31.242,-25.4 -31.242,-23.638 -26.553,-18.949 P0.3@-26.553,-18.751
DB3: D8.1 DB3.1 P0.5 | length 14.1
  Top Layer w0.4: D8.1@-35.122,-28.956 DB3.1@-31.242,-28.956 -30.018,-27.732 -30.018,-23.7 -27.662,-21.344 -26.606,-21.344 P0.5@-26.553,-21.291
DB4: D9.1 DB4.1 P2.8 | length 15.4
  Top Layer w0.4: P2.8@26.406,-19.767 27.647,-18.526 29.46,-18.526 30.187,-19.253 30.187,-20.084 31.294,-21.19 32.404,-21.19 33.635,-19.959 DB4.1@33.635,-18.288 D9.1@37.515,-18.288
DB5: D10.1 DB5.1 P2.7 | length 9.4
  Top Layer w0.4: P2.7@28.946,-19.767 31.023,-21.844 DB5.1@33.635,-21.844 D10.1@37.515,-21.844
DB6: D11.1 DB6.1 P2.1 | length 9.4
  Top Layer w0.4: P2.1@28.946,-27.387 30.933,-25.4 DB6.1@33.635,-25.4 D11.1@37.515,-25.4
DB7: D12.1 DB7.1 P2.2 | length 15.6
  Top Layer w0.4: P2.2@26.406,-27.387 27.647,-28.628 29.921,-28.628 30.187,-28.362 30.187,-27.07 31.204,-26.054 32.404,-26.054 33.635,-27.285 DB7.1@33.635,-28.956 D12.1@37.515,-28.956
GND: 5V.3 5V.4 +5V.3 +5V.4 B1.2 B2.2 B3.2 C2_S1.1 C2_S2.1 C2_S3.1 C2_S4.1 C2_S5.1 C2_S6.1 C2_S7.1 C4_S1.2 C4_S2.2 C4_S3.2 C4_S4.2 C4_S5.2 C4_S6.2 C4_S7.2 C5_S1.2 C5_S2.2 C5_S3.2 C5_S4.2 C5_S5.2 C5_S6.2 C5_S7.2 D1.K D2.K D3.K D4_S1.A D4_S2.A D4_S3.A D4_S4.A D4_S5.A D4_S6.A D4_S7.A GND.1 R5.1 R6_S1.2 R6_S2.2 R6_S3.2 R6_S4.2 R6_S5.2 R6_S6.2 R6_S7.2 R10_S1.1 R10_S2.1 R10_S3.1 R10_S4.1 R10_S5.1 R10_S6.1 R10_S7.1 R11_S1.1 R11_S2.1 R11_S3.1 R11_S4.1 R11_S5.1 R11_S6.1 R11_S7.1 R12.1 R13.1 R14.1 R15.1 R16.1 R17.1 R18.1 R19.1 U1_S1.3 U1_S1.4 U1_S2.3 U1_S2.4 U1_S3.3 U1_S3.4 U1_S4.3 U1_S4.4 U1_S5.3 U1_S5.4 U1_S6.3 U1_S6.4 U1_S7.3 U1_S7.4 U2_S1.4 U2_S2.4 U2_S3.4 U2_S4.4 U2_S5.4 U2_S6.4 U2_S7.4 | length 139.6
  Top Layer w0.4: U1_S4.3@-39.022,3.429 v1(-37.338,3.429) ; D4_S4.A@-39,-7.3 v1(-37.338,-7.3) ; v1(-33.528,-4.589) R11_S4.1@-33.528,-3.032 ; C4_S4.2@-33.528,10.89 v1(-33.528,12.446) ; v1(-30.734,-4.589) R10_S4.1@-30.734,-3.032 ; R5.1@-19.39,29.223 v1(-19.39,30.734) ; C4_S2.2@-14.224,-51.894 v1(-12.7,-51.894) ; C5_S2.2@-14.224,-36.67 -14.074,-36.67 -13.151,-35.747 -12.777,-35.747 v1(-12.7,-35.67) ; C5_S4.2@-14.224,10.176 v1(-12.7,10.176) ; U2_S7.4@-11.557,36.572 U2_S7.4@-11.557,36.682 v1(-11.557,38.284) ; v1(-11.176,-9.144) C5_S3.2@-11.176,-7.604 ; U1_S7.3@-10.287,51.922 v1@-10.287,53.334 ; v1(-9.652,26.124) C2_S7.1@-8.128,26.124 ; U1_S2.3@-9.017,-53.61 -9.017,-56.372 -8.449,-56.94 -7.513,-56.94 -6.988,-56.415 -5.561,-56.415 -5,-56.976 -5,-57.294 D4_S2.A@-4.7,-57.594 ; v1(-8.89,55.052) -7.313,55.052 -6.988,54.727 -5.561,54.727 -5,55.288 -5,55.606 D4_S7.A@-4.7,55.906 ; R6_S4.2@-8.128,19.034 v1(-6.604,19.034) C2_S4.1@-5.08,19.034 ; v1(-7.747,-55.372) U1_S2.4@-7.747,-53.61 ; v1(-7.747,6.858) U2_S4.4@-7.747,8.476 ; v1(-6.604,-27.812) C2_S2.1@-5.08,-27.812 ; v1(-6.604,33.204) C5_S7.2@-5.08,33.204 ; v1(-6.604,48.588) C4_S7.2@-5.08,48.588 ; C2_S3.1@-5.08,-12.462 v1(-5.08,-10.922) -5.08,-10.821 -4.699,-10.44 U2_S3.4@-4.699,-9.304 U2_S3.4@-4.764,-9.369 ; D4_S3.A@0,-0.8 0.225,-0.8 0.704,-0.321 1.682,-0.321 3.139,-1.778 5.334,-1.778 5.969,-2.413 U1_S3.3@5.969,-3.904 U1_S3.3@5.963,-3.898 ; D4_S1.A@4.7,-57.594 5,-57.294 5,-56.976 5.561,-56.415 6.988,-56.415 7.313,-56.74 v1(8.89,-56.74) ; D4_S6.A@4.7,55.906 5,55.606 5,55.288 5.561,54.727 6.988,54.727 7.513,55.252 8.449,55.252 9.017,54.684 U1_S6.3@9.017,51.922 ; C4_S1.2@5.08,-50.276 v1(6.604,-50.276) ; C5_S1.2@5.08,-34.892 v1(6.604,-34.892) ; C5_S5.2@5.08,10.176 v1(6.604,10.176) ; C2_S6.1@5.08,26.124 v1(6.604,26.124) ; U1_S6.4@7.747,51.922 v1(7.747,53.684) ; C2_S1.1@8.128,-27.812 v1(9.652,-27.812) ; R6_S5.2@8.128,19.034 v1(9.652,19.034) C2_S5.1@11.176,19.034 ; v1(10.287,-55.022) U1_S1.3@10.287,-53.61 ; C4_S3.2@11.176,-5.604 v1(11.176,-4.064) ; v1(11.557,-39.972) U2_S1.4@11.557,-38.37 U2_S1.4@11.557,-38.26 ; U2_S5.4@11.61,8.476 v1(12.7,8.476) ; v1(12.7,33.982) 12.777,34.059 13.151,34.059 14.074,34.982 C5_S6.2@14.224,34.982 ; v1(12.7,50.206) C4_S6.2@14.224,50.206 ; v1(33.412,-4.572) R10_S5.1@33.412,-3.032 ; v1(36.206,-4.572) C4_S5.2@36.206,-3.032 ; R11_S5.1@36.206,10.89 v1(36.206,12.446) ; D4_S5.A@39,-7.3 39.3,-7 39.569,-7 40.179,-6.39 40.179,-4.779 40.922,-4.036 42.863,-4.036 43.949,-2.95 43.949,3.722 42.972,4.699 U1_S5.3@41.7,4.699
  Top Layer w0.762: +5V.4@-26.553,-32.848 +5V.3@-24.013,-32.848 ; 5V.4@26.406,-32.848 5V.3@28.946,-32.848
  Bottom Layer w0.4: v1@-37.338,-7.303 v1(-37.338,3.429) ; v1@-10.287,53.334 v1(-10.287,53.684) -10.287,54.319 -9.554,55.052 v1(-8.89,55.052) ; v1(8.89,-56.74) 9.554,-56.74 10.287,-56.007 v1(10.287,-55.022)
  Bottom Layer w0.762: +5V.4@-26.553,-32.848 +5V.3@-24.013,-32.848 ; 5V.4@26.406,-32.848 5V.3@28.946,-32.848
  other v1: -33.02,-42.164 35.413,-42.164 -8.128,-41.402 8.128,-41.402 -33.02,-39.116 35.413,-39.116 -33.02,-36.068 35.413,-36.068 -33.02,-33.02 35.413,-33.02 2.54,-14.462 41.678,-7.3 0,-3.904 -3.302,1.254 43.688,5.969 -8.128,39.714 8.128,39.714
Is_White1: P0.6 R8_S1.1 U2_S1.7 Vo_S1.1 | length 81.6
  Top Layer w0.4: v1@-27.834,-37.408 -27.834,-37.278 -28.056,-37.056 -28.056,-25.558 -27.57,-25.072 -23.499,-25.072 -22.772,-24.345 -22.772,-22.532 P0.6@-24.013,-21.291 ; v1(-20.066,-37.408) v1(-15.748,-37.408) ; R8_S1.1@5.08,-27.812 3.938,-27.812 3.556,-28.194 3.556,-30.865 4.161,-31.47 8.783,-31.47 9.017,-31.704 U2_S1.7@9.017,-32.97 v1(9.017,-34.892) ; R8_S1.1@5.092,-27.8 6.37,-27.8 6.604,-27.566 6.604,-26.814 6.838,-26.58 7.62,-26.58 8.128,-26.072 Vo_S1.1@8.128,-24.384
  Bottom Layer w0.4: v1(-27.823,-37.397) -27.818,-37.402 -20.072,-37.402 v1(-20.066,-37.408) ; v1(-15.748,-37.408) -11.36,-37.408 -9.652,-39.116 7.874,-39.116 9.017,-37.973 v1(9.017,-34.892)
Is_White2: P0.8 R8_S2.1 U2_S2.7 Vo_S2.1 | length 55.5
  Top Layer w0.4: v1@-26.735,-38.984 v1(-26.603,-39.116) ; v1@-26.734,-38.985 -26.734,-39.062 -26.788,-39.116 -28.237,-39.116 -29.364,-37.989 -29.364,-24.321 -27.632,-22.59 -25.254,-22.59 P0.8@-24.013,-23.831 P0.8@-24.177,-23.995 ; v1(-18.831,-39.116) -12.545,-39.116 -12.311,-38.882 -12.311,-36.896 -11.192,-35.777 -10.521,-35.777 -10.287,-35.543 U2_S2.7@-10.287,-32.97 -10.287,-28.939 -9.292,-27.944 -8.26,-27.944 R8_S2.1@-8.128,-27.812 Vo_S2.1@-8.128,-24.384
  Bottom Layer w0.4: v1(-26.603,-39.116) v1(-18.831,-39.116)
Is_White3: P15.4 R8_S3.1 U2_S3.7 Vo_S3.1 | length 25.7
  Top Layer w0.4: v1(-21.844,3.845) v1@-16.418,3.845 ; Vo_S3.1@-11.176,0.254 -9.278,0.254 -8.278,-0.746 R8_S3.1@-8.128,-0.746 -8.128,-1.778 -7.245,-2.661 -7.245,-3.898 U2_S3.7@-7.239,-3.904
  Bottom Layer w0.4: P15.4@-24.013,-0.209 -23.791,-0.209 -21.844,1.738 v1(-21.844,3.845) ; v1(-16.418,3.81) -12.23,3.81 -11.176,2.756 Vo_S3.1@-11.176,0.254
Is_White4: P15.3 R8_S4.1 U2_S4.7 Vo_S4.1 | length 34.3
  Top Layer w0.4: Vo_S4.1@-14.224,17.034 R8_S4.1@-11.176,17.034 -11.176,16.002 -10.293,15.119 -10.293,13.882 U2_S4.7@-10.287,13.876
  Bottom Layer w0.4: P15.3@-26.553,-0.209 -25.312,1.032 -23.475,1.032 -22.772,1.735 -22.772,4.335 -21.41,5.697 -21.41,9.218 -22.118,9.926 -22.118,13.95 -21.244,14.824 -21.244,16.348 -20.558,17.034 Vo_S4.1@-14.224,17.034
Is_White5: P1.6 R8_S5.1 U2_S5.7 Vo_S5.1 | length 44.1
  Top Layer w0.4: R8_S5.1@5.08,17.034 5.23,17.034 6.622,15.642 8.591,15.642 9.07,15.163 U2_S5.7@9.07,13.876 9.088,13.858 9.088,12.646 9.558,12.176 v1(10.34,12.176) ; Vo_S5.1@14.224,17.034 13.039,17.034 12.7,16.695 v1(12.7,13.876) 13.143,13.433 15.205,13.433 15.671,12.967 15.671,8.259 16.672,7.258 22.64,7.258 23.114,7.732 23.114,10.017 v1(24.292,11.195)
  Bottom Layer w0.4: v1(10.34,12.176) 12.04,13.876 v1(12.7,13.876) ; v1(24.292,11.195) 24.492,11.395 24.492,14.55 25.146,15.204 25.146,16.819 P1.6@26.406,18.079